# Altium PCB PCB1.PcbDoc
Units mm, origin at the board's own origin, x right, y up, seen from the top; angles counter-clockwise.
Board outline 56.64 x 44.57 mm, 2 copper layers (Top Layer, Bottom Layer); 66 components, 48 nets, 278 pads, 135 vias.
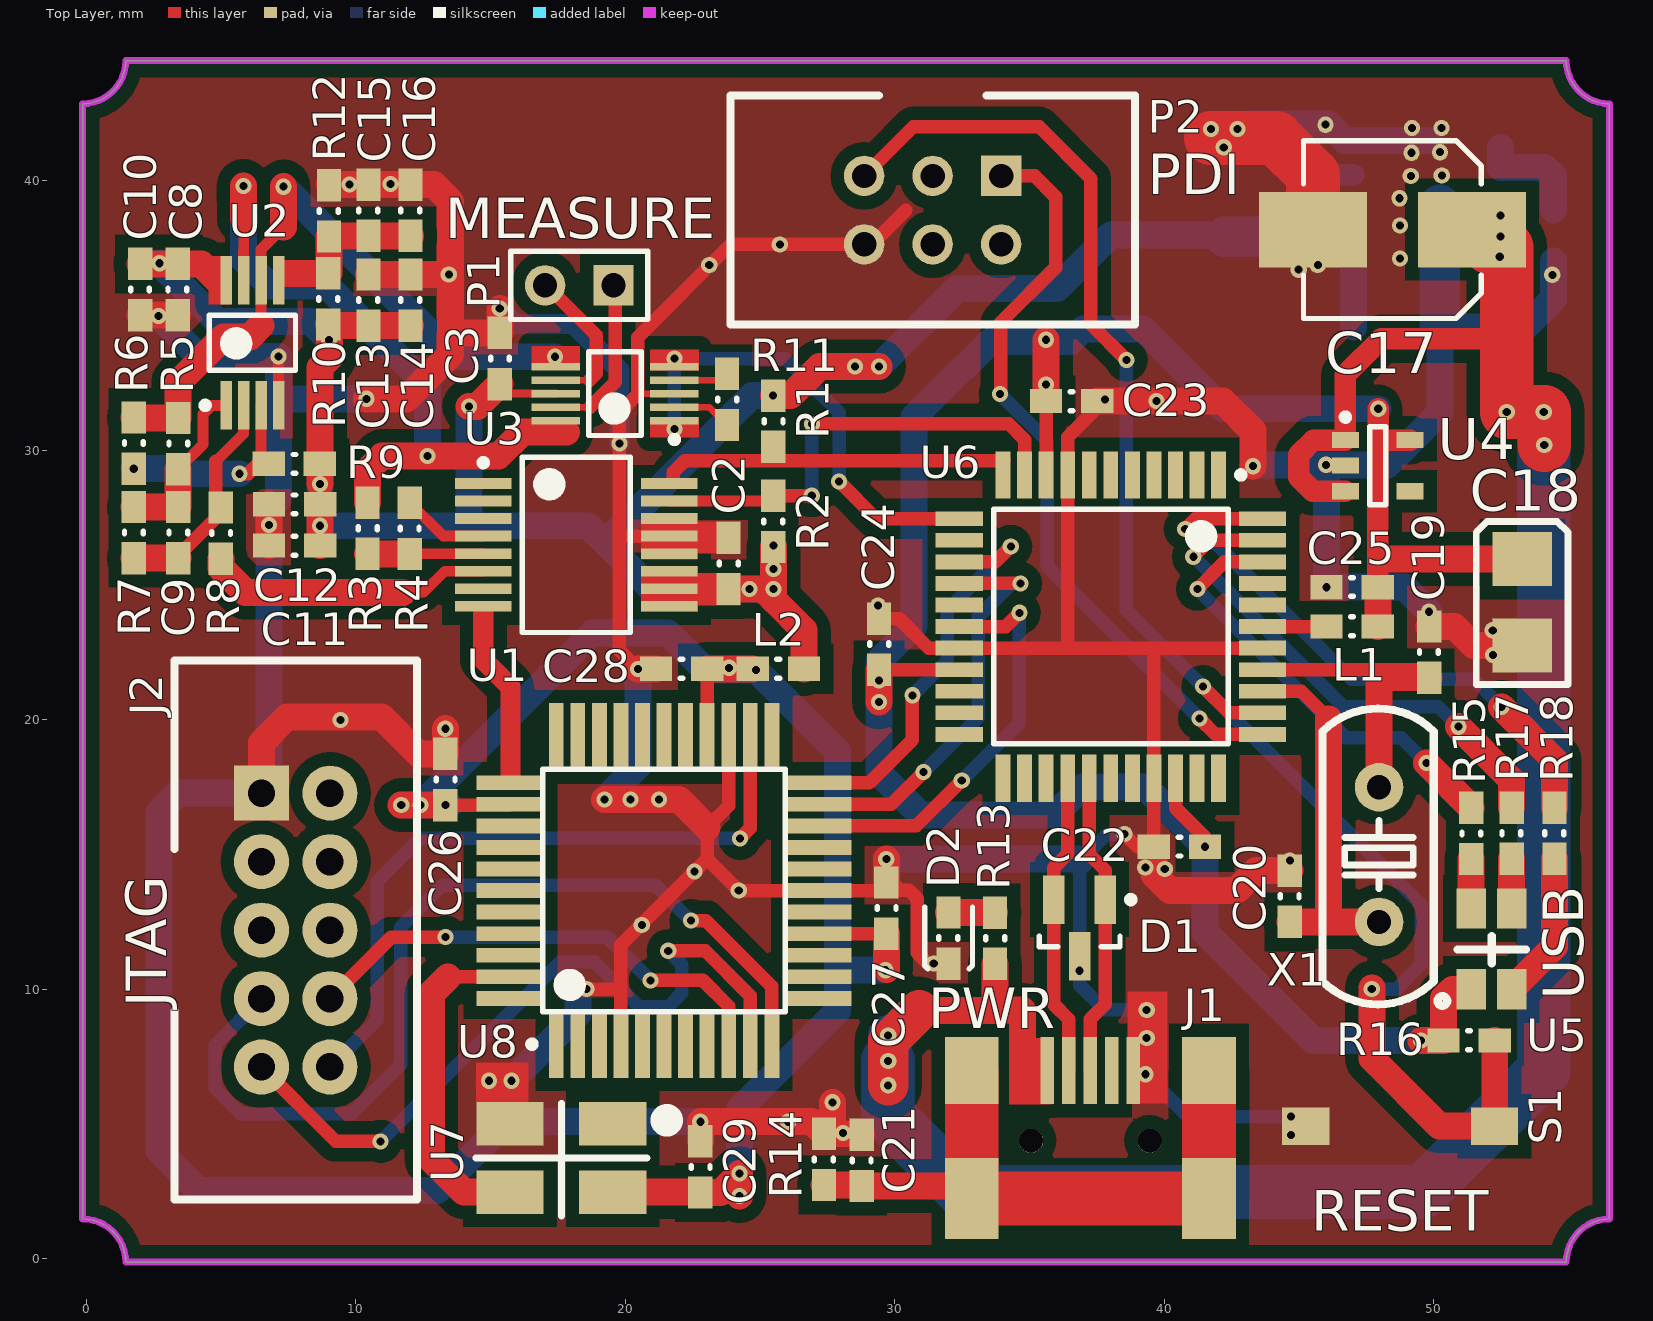
[diagram p0: Top Layer view]
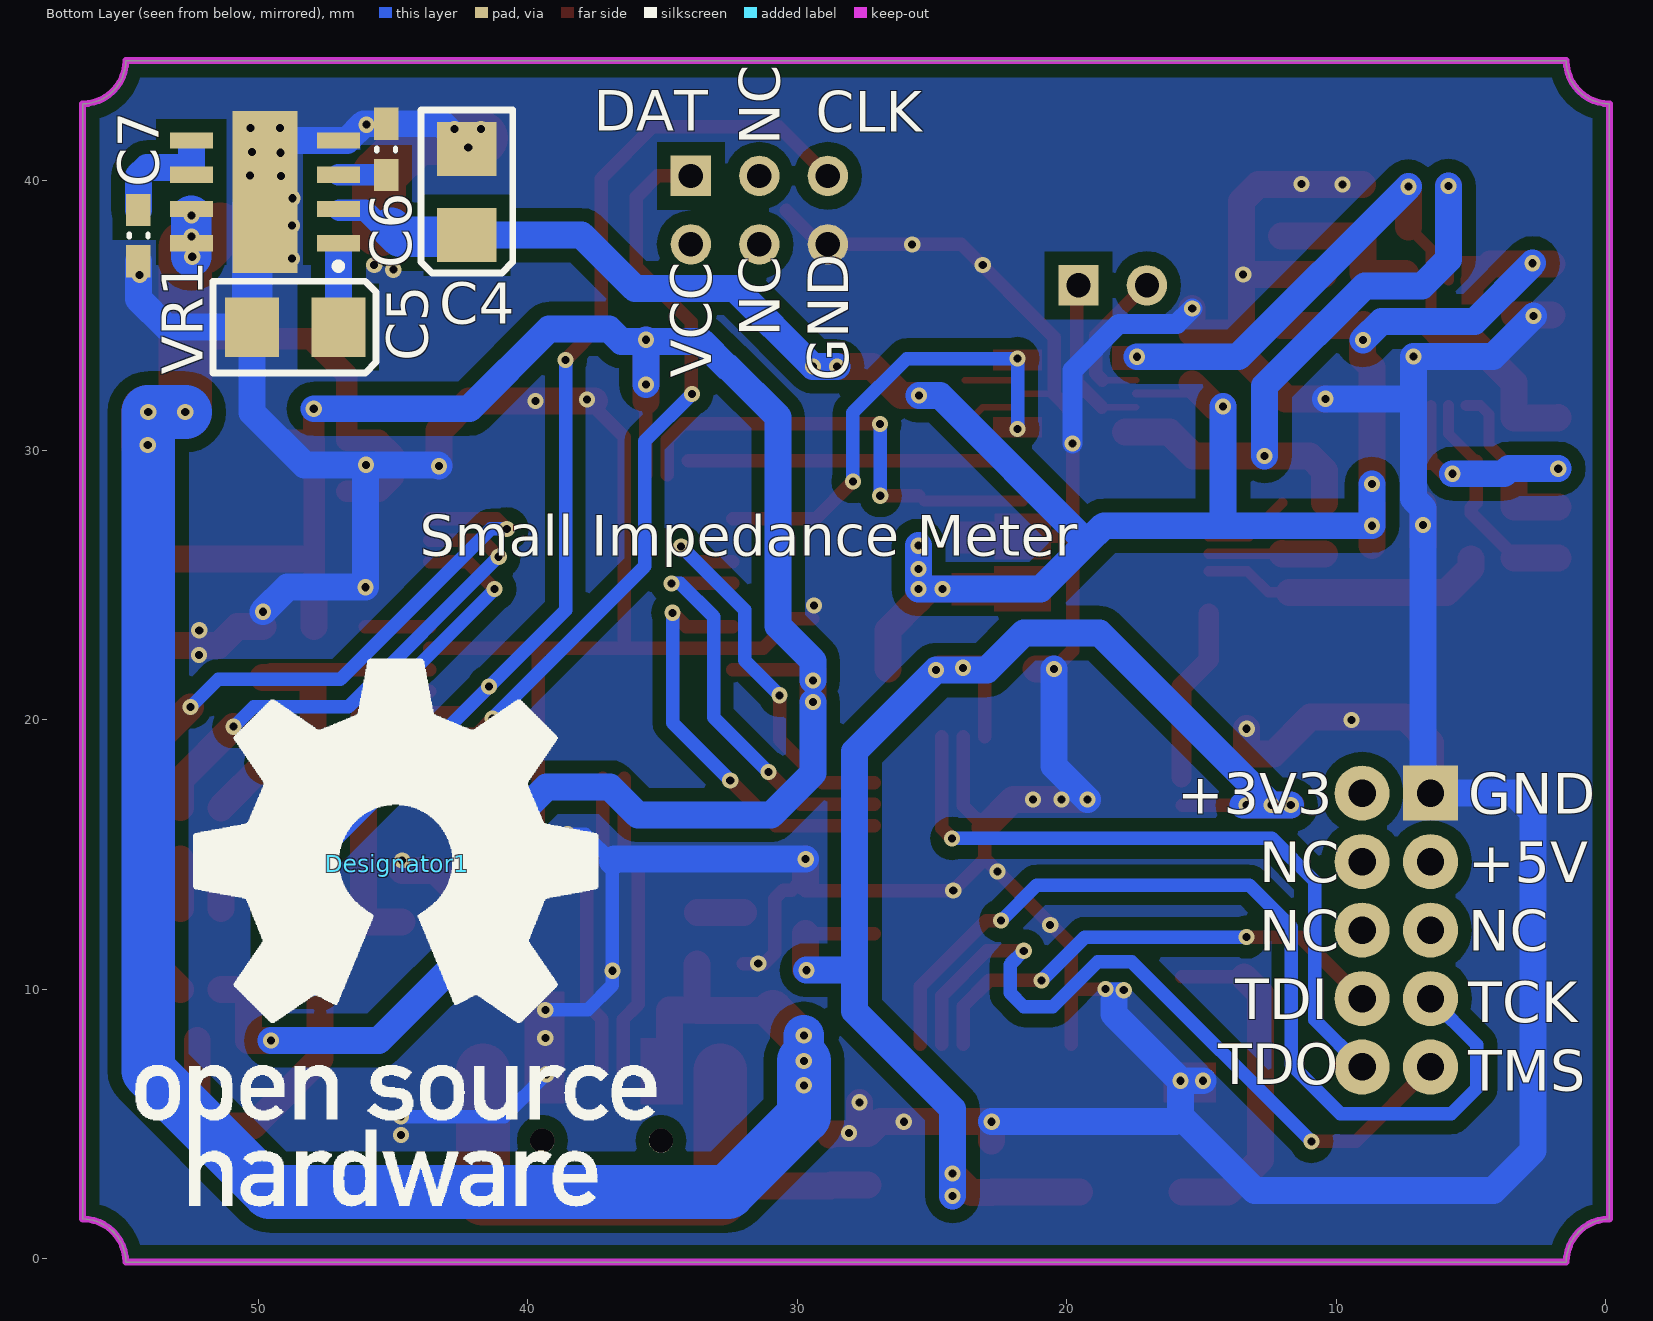
[diagram p1: Bottom Layer view, seen from below]

## Layer stack, top to bottom
Top Layer: signal copper 0.0356
Dielectric: core 0.32, FR-4, Dk 4.8
Bottom Layer: signal copper 0.0356

## Board outline
1.473,-0.127 ccw(c-0.127,-0.127) -0.127,1.473 -0.127,42.847 ccw(c-0.127,44.447) 1.473,44.447 54.917,44.447 ccw(c56.517,44.447) 56.517,42.847 56.517,1.473 ccw(c56.517,-0.127) 54.917,-0.127

## Design rules (kind name [scope] priority, off if disabled: settings)
Clearance Clearance_2 [InNamedPolygon('Bottom_GND') vs not InNet('GND')] p1: gap=0.5
Clearance Clearance_1 [InNamedPolygon('Top_GND') vs not InNet('GND')] p2: gap=0.5
Clearance [All] p3: gap=0.203
ComponentClearance [All] p1: gap=0 collisioncheckmode=3 verticalgap=0 showdistances=FALSE
DiffPairsRouting [All] p1: maxlimit=25.4 minlimit=0.203 mostfreqgap=0.381 maxuncoupledlength=12.7
HoleToHoleClearance [All] p1: gap=0 allowstackedmicrovias=TRUE
MinimumSolderMaskSliver [All] p1: minsoldermaskwidth=0
PlaneConnect [All] p1: planeconnectstyle=Direct reliefexpansion=0.508 reliefentries=4 reliefconductorwidth=0.254 reliefairgap=0.254
PolygonConnect [All] p1: connectstyle=Direct reliefconductorwidth=0.254 reliefentries=4 polygonreliefangle="90 Angle"
RoutingVias [(StartLayer = 'Top Layer') and (StopLayer = 'Bottom Layer')] p1: holewidth=0.3 width=0.6 viastyle="Through Hole" minholewidth=0.3 minwidth=0.6 maxholewidth=0.3 maxwidth=0.6
SilkToSilkClearance [All] p1: silktosilkclearance=0
SilkscreenOverComponentPads [All] p1: minsilkscreentomaskgap=0
SolderMaskExpansion [All] p1: expansion=0
Width [All] p1: maxlimit=25.4 minlimit=0.203 preferedwidth=0.381
21 further rules are at their usual default settings.

## Classes and differential pairs
component class microcontroller: C17 C18 C19 C20 C21 C22 C23 C24 C25 D1 D2 J1 L1 P2 R13 R14 R15 R16 R17 R18 S1 U4 U5 U6 X1
component class clk_gen: C26 C27 C28 C29 J2 L2 U7 U8
component class analog: C2 C3 C4 C5 C6 C7 C8 C9 C10 C11 C12 C13 C14 C15 C16 P1 R1 R2 R3 R4 R5 R6 R7 R8 R9 R10 R11 R12 U1 U2 U3 VR1
differential pair XTAL: +XTAL_P -XTAL_N
differential pair USB: +USB_P -USB_N

## Components (designator, comment, footprint, x,y, rotation, side; value= is the part's Value field where it differs from the comment)
C2 "C0603" 0603_HANDSOLDERING 23.84,25.8 r90 top
C3 "C0603" 0603_HANDSOLDERING 15.35,33.4 r90 top
C4 "Tantal B" AVX-CAPC3528_V 42.26,39.57 r90 bottom
C5 "Tantal B" AVX-CAPC3528_V 48.63,34.56 r0 bottom
C6 "C0603" 0603_HandSoldering 45.25,41.15 r270 bottom
C7 "C0603" 0603_HandSoldering 54.45,37.96 r90 bottom
C8 "C0603" 0603_HANDSOLDERING 3.4,35.95 r270 top
C9 "C0603" 0603_HANDSOLDERING 3.42,26.94 r90 top
C10 "C0603" 0603_HANDSOLDERING 2.01,35.95 r270 top
C11 "C0603" 0603_HANDSOLDERING 7.74,26.46 r0 top
C12 "C0603" 0603_HANDSOLDERING 7.74,27.99 r0 top
C13 "C0603" 0603_HANDSOLDERING 10.48,35.56 r270 top
C14 "C0603" 0603_HANDSOLDERING 12.04,35.56 r270 top
C15 "C0603" 0603_HANDSOLDERING 10.48,38.89 r270 top
C16 "C0603" 0603_HANDSOLDERING 12.04,38.89 r270 top
C17 "Alu D8" "PANASONIC SIZE D8" 48.47,38.18 r180 top
C18 "Tantal B" AVX-CAPC3528_V 53.28,24.35 r270 top
C19 "C0603" 0603_HANDSOLDERING 49.83,22.5 r270 top
C20 "C0603" 0603_HANDSOLDERING 44.66,13.44 r270 top
C21 "C0603" 0603_HANDSOLDERING 28.78,3.64 r270 top
C22 "C0603" 0603_HANDSOLDERING 40.56,15.28 r180 top
C23 "C0603" 0603_HANDSOLDERING 36.57,31.82 r0 top
C24 "C0603" 0603_HANDSOLDERING 29.42,22.8 r90 top
C25 "C0603" 0603_HANDSOLDERING 46.97,24.91 r180 top
C26 "C0603" 0603_HANDSOLDERING 13.33,17.78 r90 top
C27 "C0603" 0603_HANDSOLDERING 29.69,13.01 r90 top
C28 "C0603" 0603_HANDSOLDERING 22.09,21.88 r180 top
C29 "C0603" 0603_HANDSOLDERING 22.79,3.41 r90 top
D1 "TPD2E009" TPD2E009_SOT23_3 36.86,12.27 r270 top
D2 "LED 0603" 0603_LED 32,11.89 r270 top
Designator1 "Comment" OpenSourceHWLOGO 44.84,14.67 r180 bottom
J1 "USB_mini_B" "USB MINI B RECEPTACLE" 37.26,4.23 r0 top
J2 "JTAG_IDC10" IDC10 7.78,12.19 r270 top
L1 "i0603" 0603_HANDSOLDERING 46.97,23.45 r180 top
L2 "i0603" 0603_HANDSOLDERING 25.68,21.88 r180 top
P1 "MEASURE" HDR1X2 19.57,36.11 r180 top
P2 "PDI" PDI_HDR2X3 31.41,38.9 r180 top
R1 "R0603" 0603_HandSoldering 25.5,31.07 r90 top
R2 "R0603" 0603_HandSoldering 25.5,27.35 r270 top
R3 "R0603" 0603_HANDSOLDERING 10.44,27.1 r90 top
R4 "R0603" 0603_HANDSOLDERING 12.01,27.09 r270 top
R5 "R0603" 0603_HANDSOLDERING 3.42,30.24 r90 top
R6 "R0603" 0603_HANDSOLDERING 1.77,30.26 r90 top
R7 "R0603" 0603_HANDSOLDERING 1.77,26.94 r90 top
R8 "R0603" 0603_HANDSOLDERING 5,26.92 r90 top
R9 "R0603" 0603_HANDSOLDERING 7.73,29.49 r0 top
R10 "R0603" 0603_HANDSOLDERING 8.99,35.6 r270 top
R11 "R0603" 0603_HANDSOLDERING 23.78,31.88 r90 top
R12 "R0603" 0603_HANDSOLDERING 9.01,38.87 r270 top
R13 "R0603" 0603_HANDSOLDERING 33.72,11.89 r90 top
R14 "R0603" 0603_HANDSOLDERING 27.38,3.68 r270 top
R15 "R0603" 0603_HANDSOLDERING 51.39,15.78 r90 top
R16 "R0603" 0603_HANDSOLDERING 51.31,8.09 r180 top
R17 "R0603" 0603_HANDSOLDERING 52.89,15.78 r270 top
R18 "R0603" 0603_HANDSOLDERING 54.48,15.78 r270 top
S1 "SW-SPST" KSR221G_LFS_TACTILE_SWITCH 48.753,4.915 r180 top
U1 "AD5933" AD5933 18.19,26.48 r0 top
U2 "AD8532" AD8532_MSOP8 6.17,33.98 r90 top
U3 "TS5A23159" TS5A23159_VSSOP10 19.63,32.09 r180 top
U4 "ADP150" ADP150 47.924,29.42 r0 top
U5 "RGB_LED" PLCC-4_LED 51.39,12.99 r0 top
U6 "ATXMEGA128A4U-AU" ATXMEGAA4U_TQFP44 38.02,23.45 r270 top
U7 "TCXO" TCXO_5X3 17.634,3.735 r180 top
U8 "XC9572XL" XC9572XL_QFP44 21.444,13.655 r90 top
VR1 "ADM7150" ADM7150_SOIC8 47.03,37.67 r0 bottom
X1 "16MHz" XTAL_TH_LOW 47.97,14.99 r270 top

## Footprints (in the part's own frame and the unit in brackets; to place one, negate y for a bottom-side part, rotate by r counter-clockwise, add the part's x,y. Pads: shape width x height; smd on the part's side, far side on the other; paste and mask are expansions set on the pad)
0603_HANDSOLDERING [mm] "Chip Resistor, 2-Leads, Body 1.6x0.8mm, IPC Medium Density"
  rect 1.2x0.9 smd: 1(-0.954,0) 2(0.946,0)
  silkscreen extent -0.05,-0.36 0.05,0.34, body extent -0.85,-0.48 0.85,0.47, height 0.6
0603_HandSoldering [mm] "Chip Resistor, 2-Leads, Body 1.6x0.8mm, IPC Medium Density"
  rect 1.2x0.9 smd: 1(-0.954,0) 2(0.946,0)
  silkscreen extent -0.05,-0.36 0.05,0.34, body extent -0.85,-0.48 0.85,0.47, height 0.6
0603_LED [mm] "SMD LED, Body 1.6x0.8mm"
  rect 1.2x0.9 smd: 1(-0.954,0) 2(0.946,0)
  silkscreen extent -1.14,-0.89 1.14,0.89, body extent -0.85,-0.48 0.85,0.47, height 0.6
AD5933 [mm] "SOP, 16-Leads, Body 6,5x5,6mm (max), Pitch 0,65mm, IPC Medium Density"
  rect 2.1x0.4 smd: 1(-3.45,2.275) 2(-3.45,1.625) 3(-3.45,0.975) 4(-3.45,0.325) 5(-3.45,-0.325) 6(-3.45,-0.975) 7(-3.45,-1.625) 8(-3.45,-2.275) 9(3.45,-2.275) 10(3.45,-1.625) 11(3.45,-0.975) 12(3.45,-0.325) 13(3.45,0.325) 14(3.45,0.975) 15(3.45,1.625) 16(3.45,2.275)
  silkscreen extent -3.57,-3.25 2,3.25, body extent -2.8,-3.25 2.8,3.25, height 2
AD8532_MSOP8 [mm] "TSOP, 8-Leads, Body 3,2x3,2mm (max), Pitch 0,65mm, IPC Medium Density"
  rect 1.8x0.43 smd: 1(-2.325,0.975) 2(-2.325,0.325) 3(-2.325,-0.325) 4(-2.325,-0.975) 5(2.325,-0.975) 6(2.325,-0.325) 7(2.325,0.325) 8(2.325,0.975)
  silkscreen extent -2.45,-1.6 1.03,1.87, body extent -1.6,-1.6 1.6,1.6, height 1.1
ADM7150_SOIC8 [mm] "SOIC, 8-Leads, Body 4,90x3,90mm, Pitch 1,27mm, Thermal Pad 6,00x2,41mm, IPC Medium Density"
  rect 1.6x0.6 smd: 1(0,0) 2(0,-1.27) 3(0,-2.54) 4(0,-3.81) 5(5.45,-3.81) 6(5.45,-2.54) 7(5.45,-1.27) 8(5.45,0)
  rect 2.41x6 smd: 4(2.725,-1.905)
  silkscreen extent -0.12,0.73 0.13,0.97, body extent 0.72,-4.41 4.72,0.6, height 1.65
ADP150 [mm] "SOT23, 5-Leads, Body 2,9x2,8mm (max), Pitch 0,95mm, IPC Medium Density"
  rect 1x0.6 smd: 1(-1.2,0.95) 2(-1.2,0) 3(-1.2,-0.95) 4(1.2,-0.95) 5(1.2,0.95)
  silkscreen extent -1.32,-1.45 0.3,1.92, body extent -0.8,-1.45 0.8,1.45, height 1
ATXMEGAA4U_TQFP44 [mm] "TQFP, 44-Leads, Body 12,3x12,3mm (max), Pitch 0,80mm, IPC Medium Density"
  rect 1.75x0.55 smd: 1(-5.625,4) 2(-5.625,3.2) 3(-5.625,2.4) 4(-5.625,1.6) 5(-5.625,0.8) 6(-5.625,0) 7(-5.625,-0.8) 8(-5.625,-1.6) 9(-5.625,-2.4) 10(-5.625,-3.2) 11(-5.625,-4) 23(5.625,-4) 24(5.625,-3.2) 25(5.625,-2.4) 26(5.625,-1.6) 27(5.625,-0.8) 28(5.625,0) 29(5.625,0.8) 30(5.625,1.6) 31(5.625,2.4) 32(5.625,3.2) 33(5.625,4)
  rect 0.55x1.75 smd: 12(-4,-5.625) 13(-3.2,-5.625) 14(-2.4,-5.625) 15(-1.6,-5.625) 16(-0.8,-5.625) 17(0,-5.625) 18(0.8,-5.625) 19(1.6,-5.625) 20(2.4,-5.625) 21(3.2,-5.625) 22(4,-5.625) 34(4,5.625) 35(3.2,5.625) 36(2.4,5.625) 37(1.6,5.625) 38(0.8,5.625) 39(0,5.625) 40(-0.8,5.625) 41(-1.6,5.625) 42(-2.4,5.625) 43(-3.2,5.625) 44(-4,5.625)
  silkscreen extent -5.75,-4.35 4.35,4.95, body extent -5,-5 5,5, height 1.2
AVX-CAPC3528_V [mm] "SMT Capacitor, 2 Leads, Body 3.5x2.8mm"
  rect 2x2.2 smd: 1(-1.6,0) 2(1.6,0)
  silkscreen extent -3,-1.7 3.05,1.7, body extent -1.79,-1.54 1.8,1.54, height 1.9
HDR1X2 [mm] "Connector; Header; 2 Position"
  rect 1.5x1.5 hole 0.9: 1(0,0)
  round 1.5 hole 0.9: 2(2.54,0)
  silkscreen extent -1.27,-1.27 3.81,1.27
IDC10 [mm] "IDC 10 pin connector"
  rect 2.04x2.04 hole 1.02: 1(-5.08,-1.27)
  round 2.04 hole 1.02: 2(-2.54,-1.27) 3(0,-1.27) 4(2.54,-1.27) 5(5.08,-1.27) 6(5.08,1.27) 7(2.54,1.27) 8(0,1.27) 9(-2.54,1.27) 10(-5.08,1.27)
  silkscreen extent -10,-4.5 10,4.5, body extent -10.15,-4.4 10.15,4.7, height 9.3
KSR221G_LFS_TACTILE_SWITCH [mm] "C & K COMPONENTS  KSR221G LFS  SWITCH, SPST, 0.05A, 32VDC, SMD"
  rect 1.75x1.4 smd: 1(-3.5,0) 2(3.5,0)
  body extent -3.18,-2.03 3.18,2.03, height 2.5
OpenSourceHWLOGO [mm] "OpenSourceHWLOGO"
  silkscreen extent -9.72,-12.73 9.6,7.57
"PANASONIC SIZE D8" [mm] "Aluminum Electrolytic Capacitor, Body 6,60x6,60x7,70mm, IPC Low Density"
  rect 4x2.8 smd: 1(-2.95,0) 2(2.95,0)
  silkscreen extent -3.3,-3.3 3.3,3.3, body extent -3.3,-3.3 3.3,3.3, height 7.7
PDI_HDR2X3 [mm] "PDI Connector; Header; 3x2 Position"
  rect 1.5x1.5 hole 0.9: 1(-2.54,-1.27)
  round 1.5 hole 0.9: 2(-2.54,1.27) 3(0,-1.27) 4(0,1.27) 5(2.54,-1.27) 6(2.54,1.27)
  silkscreen extent -7.5,-4.25 7.5,4.25, body extent -7.62,-4.47 7.62,4.98, height 9.1
PLCC-4_LED [mm] "Standard PLCC-4 LED package"
  rect 1.1x1.5 smd: 1(0,-3) 2(0,0) 3(1.5,0) 4(1.5,-3)
  silkscreen extent -1.25,-3.61 2.03,-1.02, body extent -0.63,-3.11 2.16,0.06, height 1.9
TCXO_5X3 [mm] "TCXO 5mm x 3.2mm"
  rect 2.5x1.6 smd: 1(-1.905,-1.27) 2(1.905,-1.27) 3(1.905,1.27) 4(-1.905,1.27)
  silkscreen extent -4.01,-2.03 3.17,2.16, body extent -2.54,-1.59 2.54,1.59, height 1.5
TPD2E009_SOT23_3 [mm] "SOT23, 3-Leads, Body 3,0x2,6mm (max), Pitch 0,95mm, IPC Medium Density"
  rect 1.8x0.8 smd: 1(-1.05,0.95) 2(-1.05,-0.95) 3(1.05,0)
  silkscreen extent -1.17,-1.5 0.7,2.03, body extent -0.7,-1.52 0.7,1.52, height 1.12
TS5A23159_VSSOP10 [mm] "TSSOP, 10-Leads, Body 3,1x3,1mm (max), Pitch 0,50mm, IPC Medium Density"
  rect 1.8x0.27 smd: 1(-2.2,1) 2(-2.2,0.5) 3(-2.2,0) 4(-2.2,-0.5) 5(-2.2,-1) 6(2.2,-1) 7(2.2,-0.5) 8(2.2,0) 9(2.2,0.5) 10(2.2,1)
  silkscreen extent -2.33,-1.55 0.97,1.82, body extent -1.55,-1.55 1.55,1.55, height 1.1
"USB MINI B RECEPTACLE" [mm] "popravek"
  rect 0.5x2.5 smd: 1(-1.6,2.75) 2(-0.8,2.75) 3(0,2.75) 4(0.8,2.75) 5(1.6,2.75)
  rect 2x3 smd: 6(-4.4,-2) 6(4.4,-2)
  rect 2x2.5 smd: 6(-4.4,2.75) 6(4.4,2.75)
  round 0.9 hole 0.9: ""(-2.2,0.15) ""(2.2,0.15)
  body extent -4.95,-5.75 4.95,3.25, height 4
XC9572XL_QFP44 [mm] "QFP, 44-Leads, Body 9,80x9,80mm, Pitch 0,80mm, IPC Medium Density"
  rect 2.5x0.55 smd: 1(-5.7,4) 2(-5.7,3.2) 3(-5.7,2.4) 4(-5.7,1.6) 5(-5.7,0.8) 6(-5.7,0) 7(-5.7,-0.8) 8(-5.7,-1.6) 9(-5.7,-2.4) 10(-5.7,-3.2) 11(-5.7,-4) 23(5.7,-4) 24(5.7,-3.2) 25(5.7,-2.4) 26(5.7,-1.6) 27(5.7,-0.8) 28(5.7,0) 29(5.7,0.8) 30(5.7,1.6) 31(5.7,2.4) 32(5.7,3.2) 33(5.7,4)
  rect 0.55x2.5 smd: 12(-4,-5.7) 13(-3.2,-5.7) 14(-2.4,-5.7) 15(-1.6,-5.7) 16(-0.8,-5.7) 17(0,-5.7) 18(0.8,-5.7) 19(1.6,-5.7) 20(2.4,-5.7) 21(3.2,-5.7) 22(4,-5.7) 34(4,5.7) 35(3.2,5.7) 36(2.4,5.7) 37(1.6,5.7) 38(0.8,5.7) 39(0,5.7) 40(-0.8,5.7) 41(-1.6,5.7) 42(-2.4,5.7) 43(-3.2,5.7) 44(-4,5.7)
  silkscreen extent -5.82,-4.5 4.5,5.02, body extent -4.9,-4.9 4.9,4.9, height 2.45
XTAL_TH_LOW [mm] "XTAL TH low profile"
  round 1.8 hole 0.9: 1(-2.5,0) 2(2.5,0)
  silkscreen extent -5.42,-2.1 5.55,2.03, body extent -5.46,-2.16 5.59,2.03, height 3

## Part data
C2 C3 C6 C7 C8 C9 C10 C11 C12 C13 C14 C15 C16 C19 C20 C21 C22 C23 C24 C25 C26 C27 C28 C29: library part Capacitor, "Ceramic Capacitor"
C4 C5 C18: library part "Capacitor Tantalum", "Tantalum Capacitor"
C17: library part "Capacitor Aluminium", "Aluminium Electrolythic Capacitor"
D1: "ESD protection"
D2: library part LED, "SMD LED 0603"
J1: "USB 2.0 mini B receptacle"
J2: "JTAG IDC10 Bus Pirate"
L1 L2: library part Inductor, "Inductor"
P1: library part "Header 2", "Header, 2-Pin"
P2: library part PDI_Header, "PDI Programming Interface"
R1 R2 R3 R4 R5 R6 R7 R8 R9 R10 R11 R12 R13 R14 R15 R16 R17 R18: library part Resistor, "Resistor"
S1: "KSR221G LFS Tactile Switch"
U1: "network analyzer"
U2: "opamp high current out"
U3: "1-Ohm 5-V/3.3-V 2-Channel SPDT Switch"
U4: "100 mA +5V regulator"
U5: "RGB LED ASMB-MTB0-0A3A2"
U6: "8/16-bit Atmel XMEGA Microcontroller"
U7: "FOX FOX924B-16.000  TCXO, 16.0MHZ, 3.3V CMOS, SMD"
U8: "Xilinx CPLD 72 macrocells"
VR1: "800 mA Ultralow Noise,  High PSRR, RF Linear Regulator"
X1: "XTAL TH low profile"

## Via types
v1: diameter 0.6, hole 0.3, Top Layer to Bottom Layer, tented both sides, 135 vias

## Nets (pads, with @x,y where several pads share a name; then routed paths per layer and width w, separated by ;. In a path a pad name is that pad's centre, name@x,y a point inside that pad or via, vN(x,y) a via of type N, cw(c..) or ccw(c..) an arc to the next point about the centre after c; other vN are vias at no path point)
+3.3V_A: C2.1 C3.1 C4.1 C8.1 C10.1 C11.2 C12.2 C13.2 C14.2 L2.1 R1.2 R2.2 R9.2 R10.2 U1.9 U1.10 U1.11 U2.8 U3.8 VR1.2 | length 90.9
  Top Layer w0.3: C3.1@15.21,32.09 U3.8
  Top Layer w1: C10.1 C8.1 4.276,36.904 4.9,36.28 ; C11.2 v1(8.686,27.19) C12.2 ; v1(8.686,28.74) 8.686,29.48 R9.2 8.676,33.066 9.03,33.42 R10.2@9.03,34.614 ; R10.2 R10.2@9.03,34.614 ; C14.2 C13.2 R10.2@9.03,34.614 ; v1(14.21,31.62) 14.524,31.62 C3.1 ; C2.1 25.104,24.846 25.5,24.45 ; 25.5,24.44 25.5,24.45 ; R2.2 25.5,24.45 ; R1.2 26.136,32.016 27.22,33.1 v1(28.53,33.1) v1(29.42,33.1) ; L2.1 26.634,23.316 25.5,24.45
  Bottom Layer w0.8: 45.06,38.24 45.38,38.24 46.041,38.901 VR1.2@46.991,38.901
  Bottom Layer w1: v1(2.72,36.93) 4.88,34.77 8.33,34.77 v1(9.02,34.08) ; v1(8.686,28.74) v1(8.686,27.19) 14.21,27.19 ; v1(14.21,31.62) 14.21,27.19 ; v1(25.49,32.02) 24.71,32.02 19.26,26.57 19.25,26.57 ; v1(25.51,26.45) v1(25.51,24.84) 20.98,24.84 19.25,26.57 ; v1(28.53,33.1) v1(29.42,33.1) 32.32,36 36.03,36 38,37.97 C4.1 ; 14.21,27.19 18.63,27.19 19.25,26.57
  Bottom Layer w1.5: C4.1@42.26,37.92 44.74,37.92 45.06,38.24
  other v1: 24.61,24.84 25.51,25.59
+3.3V_C: C26.1 C27.1 C28.1 C29.1 L2.2 U7.4 U8.15 U8.26 U8.35 | length 59.5
  Top Layer w0.5: v1(13.33,16.826) U8.35@15.715,16.826 ; U8.26 C28.1 ; U8.15 C27.1 ; v1(29.66,10.7) v1@29.69,10.73
  Top Layer w1: v1@11.69,16.826 v1(11.696,16.826) v1(12.41,16.826) v1(13.33,16.826) ; U7.4 C29.1@22.781,2.465 ; C29.1 23.536,2.456 v1(24.24,3.16) v1(24.24,2.32) ; C28.1 L2.2 ; v1@29.69,10.73 C27.1
  Bottom Layer w1: v1(11.696,16.826) v1(12.41,16.826) ; v1@13.474,16.826 v1(12.41,16.826) ; v1(24.24,2.32) v1(24.24,3.16) 24.24,5.55 27.88,9.19 27.88,10.7 ; v1(29.66,10.7) 27.88,10.7 ; v1(12.41,16.826) 18.794,23.21 21.6,23.21 22.97,21.84 v1(24.86,21.84) 27.88,18.82 27.88,10.7
  other v1: 23.86,21.92
+3.3V_M: C18.1 C22.1 C23.1 C24.1 C25.1 L1.1 R16.2 U4.5 U5.1 U6.9 U6.19 U6.31 | length 91.6
  Top Layer w0.5: C24.1 29.424,21.85 U6.19 ; C23.1 35.616,29.079 U6.9 ; U6.31 40.42,16.72 41.514,15.626 v1(41.514,15.28)
  Top Layer w0.8: C25.1 47.924,30.37 ; 47.927,30.37 U4.5 ; 47.94,30.383 v1(47.94,31.53)
  Top Layer w1: v1(29.42,20.65) v1(29.42,21.45) C24.1 ; v1(35.61,34.09) 35.616,34.084 v1(35.616,32.43) C23.1 ; L1.1 C25.1 ; 48.074,25.95 C18.1 ; v1(49.53,8.09) R16.2 50.364,9.664 50.69,9.99 U5.1
  Bottom Layer w1: v1(29.42,20.65) 29.42,18.01 30.97,16.46 35.92,16.46 36.95,17.49 39.304,17.49 v1(41.514,15.28) 41.514,12.106 45.53,8.09 v1(49.53,8.09) ; v1(29.42,21.45) 29.42,22.18 30.71,23.47 30.71,31.22 32.575,33.085 32.605,33.085 33.55,34.03 36.522,34.03 36.982,34.49 39.21,34.49 42.17,31.53 v1(47.94,31.53) ; v1(35.616,32.43) v1@35.616,34.09
GND: C2.2 C3.2 C4.2 C5.2 C6.1 C7.1 C8.2 C10.2 C11.1 C12.1 C13.1 C14.1 C15.1 C16.1 C17.2 C18.2 C19.1 C20.1 C21.1 C22.2 C23.2 C24.2 C25.2 C26.2 C27.2 C28.2 C29.2 D1.3 D2.2 J1.5 J2.1 P2.6 R12.1 R14.1 S1.2 U1.12 U1.13 U1.14 U2.4 U3.3 U4.2 U6.8 U6.18 U6.30 U6.38 U7.2 U8.4 U8.17 U8.25 VR1.4 | length 305.3
  Top Layer w0.25: 20.49,32.09 U3.3
  Top Layer w0.4: U2.4 v1(7.145,33.47)
  Top Layer w0.5: R12.1 R12.1@9.03,39.844 ; v1(18.57,10) 19.844,10 ; U8.4 19.844,10 ; 19.845,26.805 U1.13 ; v1(20.48,21.87) 19.79,22.56 v1(19.79,30.24) 19.79,31.39 20.49,32.09 20.477,32.103 20.477,34.187 23.92,37.63 P2.6 29.16,37.63 30.42,38.89 ; U8.25 23.844,16.804 23.04,16 23.04,14.83 ; C24.2 30.164,23.746 31.26,22.65 U6.18 36.42,22.65 ; C27.2 29.924,13.956 30.21,13.67 30.53,13.67 30.84,13.36 30.84,11.34 31.236,10.944 v1(31.45,10.944) D2.2 ; C27.2@29.7,13.655 U8.17 v1(24.215,13.655) 23.04,14.83 ; C23.2 37.516,31.576 36.42,30.48 U6.8 36.42,22.65 ; v1(38.53,15.75) 39,15.28 C22.2 ; C22.2@39.62,15.286 U6.30 39.62,22.61 ; U6.38 36.42,22.65 ; v1@46,29.42 U4.2 ; 19.844,10 19.844,11.634 23.04,14.83
  Top Layer w1: C10.2 C8.2 ; J2.1 6.51,19.14 7.46,20.09 10.97,20.09 12.334,18.726 C26.2 v1(13.33,19.66) ; C11.1 v1(6.786,27.22) C12.1 ; R12.1@9.03,39.844 C15.1 C16.1 12.906,39.844 13.53,39.22 13.53,33.55 11.88,31.9 v1(10.4,31.9) ; C13.1 C14.1 v1(13.46,36.514) v1@13.51,36.514 ; 13.624,34.346 C3.2 v1(15.35,35.25) ; v1(19.235,17.035) v1(20.2,17.035) v1(21.255,17.035) 22.005,17.035 23.04,16 ; v1(20.48,21.87) 20.49,21.88 C28.2 ; C29.2 v1(22.79,5.08) v1(26.05,5.08) 26.934,5.08 R14.1 28.74,4.634 C21.1 ; R14.1@27.69,4.944 v1(27.69,5.8) ; C27.2 v1(29.69,14.82) ; C23.2 v1(39.71,31.82) 42.18,31.82 43.285,30.715 43.29,30.72 v1(43.29,29.4) ; C22.2 39.614,14.256 40.22,13.65 42.67,13.65 43.414,14.394 C20.1 ; C19.1 50.766,23.454 51.47,22.75 C18.2
  Top Layer w2: 41.74,41.57 44.15,41.57 45.52,40.2 C17.2
  Bottom Layer w0.5: v1(17.89,9.96) 17.93,10 v1(18.57,10) ; v1(38.53,15.75) 37.87,15.75 36.86,14.74 v1(36.86,10.68) 36.86,10.15 37.78,9.23 v1(39.35,9.23) ; v1(39.31,6.84) 40.88,5.27 v1(44.71,5.27)
  Bottom Layer w0.75: v1(15.35,35.25) 15.92,34.68 18.07,34.68 19.79,32.96 v1(19.79,30.24)
  Bottom Layer w1: v1(2.69,34.97) 4.19,33.47 v1(7.145,33.47) 7.145,28.195 6.786,27.836 v1(6.786,27.22) J2.1@6.786,17.546 ; J2.1 3.42,17.27 2.7,16.55 2.7,4.01 4.18,2.53 13.03,2.53 15.78,5.28 ; 7.225,31.9 v1(10.4,31.9) ; v1(14.95,6.6) v1(15.78,6.6) ; 18.25,9.6 18.25,9.07 v1(15.78,6.6) ; v1(19.235,17.035) 19.717,17.517 20.48,18.28 v1(20.48,21.87) ; v1(22.79,5.08) 15.98,5.08 15.78,5.28 ; v1(29.69,14.82) 36.78,14.82 36.86,14.74 ; C4.2 43.194,42.104 C6.1 46.086,42.104 46.71,41.48 47.03,41.48 VR1.4@49.84,41.48 ; v1(43.29,29.4) 43.34,29.45 v1(46,29.45) 48.29,29.45 50.23,31.39 C5.2 53.4,34.56 54.45,35.61 C7.1 ; v1@46.024,29.426 v1(46.024,24.91) 48.92,24.91 v1(49.83,24) ; 15.78,5.28 v1(15.78,6.6)
  Bottom Layer w1.5: C5.2 VR1.4@50.23,39.1
  other v1: 44.71,4.59 28.08,4.66 39.35,8.19 20.62,12.38 22.57,14.36 40.02,14.46 39.3,14.51 44.66,14.77 9.44,19.98 52.2,22.39 52.19,23.31 29.38,24.23 37.8,31.88 54.4,36.5 44.99,36.69 23.12,36.87 45.7,36.87 48.75,37.1 25.74,37.63 48.75,38.33 48.73,39.34 9.77,39.85 11.29,39.87 49.15,40.17 50.3,40.18 49.17,41.03 50.23,41.05 42.21,41.23 41.74,41.91 42.72,41.91 49.19,41.95 50.29,41.95 45.98,42.07
LED_BLUE: R15.2 U6.42 | length 16.4
  Top Layer w0.5: v1(41.23,24.84) 42.24,25.85 U6.42
  Top Layer w1: v1(49.73,18.386) R15.2
  Bottom Layer w0.5: v1(41.23,24.84) 46.75,19.32 48.796,19.32 v1(49.73,18.386)
LED_GREEN: R17.1 U6.43 | length 19.1
  Top Layer w0.5: v1(41.08,26.04) 41.69,26.65 U6.43
  Top Layer w1: v1(50.915,19.735) 52.89,17.76 R17.1
  Bottom Layer w0.5: v1(41.08,26.04) 41.095,26.04 46.655,20.48 50.17,20.48 v1(50.915,19.735)
LED_RED: R18.1 U6.44 | length 22
  Top Layer w0.5: v1(40.78,27.07) 41.16,27.45 U6.44
  Top Layer w1: v1(52.52,20.46) 54.48,18.5 R18.1
  Bottom Layer w0.5: v1(40.78,27.07) 41.37,27.07 46.95,21.49 51.49,21.49 v1(52.52,20.46)
MCLK: U7.3 U8.43 | length 12.8
  Top Layer w0.5: 13.435,10.455 U8.43
  Top Layer w1: 13.435,10.455 12.81,9.83 12.81,3.68 14.025,2.465 U7.3
NetC5_1: C5.1 VR1.1 | length 2.8
  Bottom Layer w1: C5.1 VR1.1@47.03,37.39
NetC6_2: C6.2 VR1.3 | length 1.8
  Bottom Layer w0.8: C6.2@45.25,40.21 VR1.3
NetC7_2: C7.2 VR1.5 VR1.6 | length 4.1
  Bottom Layer w1: VR1.5@52.48,41.22 52.48,40.48 54.13,40.48 54.45,40.16 C7.2
NetC9_1: C9.1 R7.1 R8.2 U2.2 | length 8.5
  Top Layer w0.4: 4.82,29.58 5.076,29.836 5.589,30.349 5.845,30.605 U2.2
  Top Layer w0.5: C9.1 3.42,26.077 5,27.657 R8.2 4.82,28.046 4.82,29.58
  Top Layer w1: R7.1 C9.1
NetC9_2: C9.2 R5.1 R7.2 U2.1 | length 6.5
  Top Layer w0.4: R5.1 4.34,30.206 4.34,31.33 4.665,31.655 U2.1
  Top Layer w1: R7.2 C9.2 R5.1
NetC15_2: C15.2 C16.2 R10.1 R12.2 U2.5 | length 6
  Top Layer w1: 7.44,36.554 R10.1 9.01,36.574 R12.2 9.03,37.944 C15.2 C16.2
NetC21_2: C21.2 J1.6 R14.2 | length 23.3
  Top Layer w1: R14.2 28.74,2.734 C21.2 J1.6@32.396,2.694
  Top Layer w2: J1.6@32.86,6.98 32.86,2.23 41.66,2.23 J1.6@41.66,6.98
NetD2_1: D2.1 R13.2 | length 1.7
  Top Layer w1: D2.1 R13.2@33.712,12.844
NetL1_2: L1.2 U6.39 | length 2.4
  Top Layer w0.5: U6.39 L1.2
NetP1_1: P1.1 U3.9 | length 6.2
  Top Layer w0.25: U3.9 18.7,31.59
  Top Layer w0.5: 18.7,31.59 19.633,32.523 19.633,36.047 P1.1
NetP1_2: P1.2 U3.7 | length 5.7
  Top Layer w0.25: U3.7 18.68,32.59
  Top Layer w0.5: P1.2@17.074,36.11 18.93,34.254 18.93,32.84 18.68,32.59
  Top Layer w1: P1.2 P1.2@17.074,36.11
NetR1_1: R1.1 U1.16 U6.11 | length 12.7
  Top Layer w0.5: U1.16@21.782,28.898 21.782,29.172 22.22,29.61 U6.11@34.04,29.61
NetR2_1: R2.1 U1.15 U6.10 | length 17.2
  Top Layer w0.4: U1.15 R2.1@25.301,28.105
  Top Layer w0.5: R2.1 v1(26.924,28.304) ; v1(26.93,30.97) 34.23,30.97 34.82,30.38 U6.10
  Bottom Layer w0.5: v1@26.93,28.304 v1(26.93,30.97)
NetR3_1: R3.1 R4.2 U1.5 | length 4.3
  Top Layer w0.4: R4.2@12.021,26.155 U1.5
  Top Layer w1: R3.1 12.008,26.146 R4.2 R4.2@12.021,26.155
NetR4_1: R4.1 U1.4 | length 3.2
  Top Layer w0.4: R4.1 13.249,26.805 U1.4
NetR6_1: R6.1 R9.1 U2.3 | length 7.5
  Top Layer w0.4: R9.1@6.495,29.771 U2.3
  Top Layer w0.5: v1(5.69,29.12) 6.01,29.12 6.4,29.51 R9.1@6.756,29.51 ; R9.1@6.495,29.771 R9.1@6.756,29.51 ; R9.1 R9.1@6.756,29.51
  Bottom Layer w1: v1(1.77,29.306) 3.604,29.306 3.79,29.12 v1(5.69,29.12)
NetR11_1: R11.1 U3.2 | length 2.2
  Top Layer w0.25: U3.2 23.116,31.59 R11.1
NetR11_2: R11.2 U3.4 | length 1.9
  Top Layer w0.25: U3.4 R11.2@23.78,32.59
NetR15_1: R15.1 U5.2 | length 1.8
  Top Layer w1: U5.2 R15.1
NetR17_2: R17.2 U5.3 | length 1.8
  Top Layer w1: U5.3 R17.2
NetR18_2: R18.2 U5.4 | length 5.5
  Top Layer w1: U5.4 54.48,11.58 R18.2
NetU1_8: U1.8 U8.34 | length 6.5
  Top Layer w0.75: 14.74,23.93 14.74,22.22 15.744,21.216 U8.34@15.744,17.86
NetU3_1: U3.1 U3.5 U6.12 | length 17.1
  Top Layer w0.5: v1(27.94,28.83) 29.32,27.45 U6.12
  Bottom Layer w0.5: v1(21.83,30.78) v1(21.83,33.39) 25.94,33.39 27.94,31.39 v1(27.94,28.83)
NetU6_14: U6.14 U8.22 | length 15
  Top Layer w0.5: U8.22 29.065,17.655 30.66,19.25 v1(30.66,20.9) ; U6.14 33.74,25.85 v1(34.31,26.42)
  Bottom Layer w0.5: v1(30.66,20.9) 31.96,22.2 31.96,24.07 v1(34.31,26.42)
NetU6_15: U6.15 U8.21 | length 15.4
  Top Layer w0.5: U8.21 29.875,16.855 v1(31.07,18.05) ; U6.15 v1(34.67,25.05)
  Bottom Layer w0.5: v1(31.07,18.05) 33.11,20.09 33.11,23.82 34.34,25.05 v1(34.67,25.05)
NetU6_17: U6.17 U8.20 | length 15.6
  Top Layer w0.5: U8.20 30.805,16.055 v1(32.49,17.74) ; U6.17 34.12,23.45 v1(34.63,23.96)
  Bottom Layer w0.5: v1(32.49,17.74) 34.63,19.88 v1(34.63,23.96)
PDI_CLK: P2.5 R16.1 S1.1 U6.35 | length 60.4
  Top Layer w0.5: P2.5 30.69,41.99 35.36,41.99 37.28,40.07 37.28,34.66 v1(38.6,33.34) ; v1(41.435,21.225) 42.41,20.25 U6.35
  Top Layer w1: v1@47.71,10.05 47.71,7.42 50.215,4.915 S1.1 ; S1.1@52.264,4.926 R16.1
  Bottom Layer w0.5: v1(38.6,33.34) 38.6,24.06 v1(41.435,21.225) 49.54,13.12 49.54,10.92 48.62,10 v1(47.7,10)
PDI_DAT: P2.1 U6.34 | length 28.3
  Top Layer w0.5: v1(33.91,32.08) 33.94,32.05 33.94,34.74 35.97,36.77 35.97,39.39 35.19,40.17 P2.1 ; v1(41.31,20.04) 41.9,19.45 U6.34
  Bottom Layer w0.5: v1(33.91,32.08) 35.67,30.32 35.67,25.68 v1(41.31,20.04)
SIG: R5.2 R6.2 U2.6 U3.6 | length 25.1
  Top Layer w0.4: 6.495,34.615 U2.6 6.495,37.435 7.33,38.27
  Top Layer w1: R6.2 1.79,31.186 R5.2 3.42,32.51 5.11,34.2 6.08,34.2 6.495,34.615 ; 7.33,38.27 v1(7.33,39.77)
  Bottom Layer w1: v1(7.33,39.77) 13.64,33.46 v1(17.4,33.46)
TCK: J2.4 U8.11 | length 35.3
  Top Layer w0.5: v1(22.44,12.54) 23,12.54 25.441,10.099 25.441,7.958 U8.11
  Bottom Layer w0.5: J2.4 4.79,7.93 4.79,6.32 5.74,5.37 9.85,5.37 11.67,7.19 11.67,12.29 13.24,13.86 21.12,13.86 v1(22.44,12.54)
TDI: J2.7 U8.9 | length 18.2
  Top Layer w0.5: J2.7 11.33,11.93 v1(13.34,11.93) ; v1(20.94,10.32) 22.89,10.32 23.844,9.366 U8.9
  Bottom Layer w0.5: v1(13.34,11.93) 19.33,11.93 v1(20.94,10.32)
TDO: J2.6 U8.24 | length 25.7
  Top Layer w0.5: v1(24.26,15.59) 24.644,15.974 U8.24
  Bottom Layer w0.5: J2.6 10.8,8.86 10.8,14 12.39,15.59 v1(24.26,15.59)
TMS: J2.5 U8.10 | length 27.7
  Top Layer w0.5: J2.5 9.27,4.35 v1(10.93,4.35) ; v1(21.6,11.42) 22.97,11.42 24.644,9.746 U8.10
  Bottom Layer w0.5: v1(10.93,4.35) 17.6,11.02 18.86,11.02 20.53,9.35 21.6,9.35 22.11,9.86 22.11,10.91 v1(21.6,11.42)
USB_N: D1.2 J1.2 U6.26 | length 11.3
  Top Layer w0.5: U6.26 36.42,15.02 35.91,14.51 D1.2 35.91,9.43 36.46,8.88 J1.2
USB_P: D1.1 J1.3 U6.27 | length 11.3
  Top Layer w0.5: U6.27 37.22,15 37.81,14.41 D1.1 37.81,9.44 37.26,8.89 J1.3
VIN: R3.2 U2.7 U3.10 | length 26.7
  Top Layer w0.4: U2.7 5.85,38.61
  Top Layer w1: v1(5.845,39.79) 5.85,38.61 ; R3.2 10.44,29.23 10.985,29.775 v1(12.665,29.775) 15.305,29.775 16.2,30.67 17.834,30.67
  Bottom Layer w1: v1(5.845,39.79) 5.845,37.075 6.83,36.09 8.95,36.09 12.665,32.375 v1(12.665,29.775)
VOUT: R8.1 U1.6 | length 10.8
  Top Layer w0.4: 11.75,24.72 12.52,24.72 13.305,25.505 U1.6
  Top Layer w1: R8.1 5,25.63 5.91,24.72 11.75,24.72
VUSB: C17.1 J1.1 R13.1 U4.1 U4.3 VR1.7 VR1.8 | length 93.4
  Top Layer w0.8: U4.3 45.51,28.47 44.99,28.99 44.99,29.82 45.54,30.37 U4.1 46.724,32.794 48.05,34.12 52.71,34.12
  Top Layer w1: 30.91,9.21 33.72,9.21 ; R13.1 33.72,9.21 ; 34.74,6.22 34.74,9.23 33.74,9.23 33.72,9.21
  Top Layer w1.5: v1(29.76,6.43) v1(29.76,7.33) 29.76,8.06 30.91,9.21
  Top Layer w2: C17.1 52.08,37.52 52.71,37.52 52.71,34.12 v1(52.71,31.41) v1@54.01,31.41 ; v1(54.1,30.18) v1@54.1,31.41
  Bottom Layer w1.5: v1(29.76,7.33) v1(29.76,8.28) ; v1@52.48,37.17 VR1.8 v1(52.48,37.92) v1(52.48,38.7)
  Bottom Layer w2: v1(29.76,7.33) v1(29.76,6.43) 29.76,5.29 32.58,2.47 49.58,2.47 54.08,6.97 v1(54.08,31.41) v1(52.71,31.41)
  other v1: 52.45,37.17
XTAL_N: C20.2 U6.36 X1.2 | length 13.7
  Top Layer w0.5: U6.36 45.08,21.05 46.1,20.03
  Top Layer w1: C20.2 X1.2@47.966,12.494 ; 46.1,12.494 46.1,20.03
XTAL_P: C19.2 U6.37 X1.1 | length 12.2
  Top Layer w0.5: U6.37 49.534,21.85 C19.2
  Top Layer w1: X1.1 47.97,21.554 C19.2
pads on no net: J1. J1.4 J2.2 J2.3 J2.8 J2.9 J2.10 P2.2 P2.3 P2.4 U1.1 U1.2 U1.3 U1.7 U4.4 U6.1 U6.2 U6.3 U6.4 U6.5 U6.6 U6.7 U6.13 U6.16 U6.20 U6.21 U6.22 U6.23 U6.24 U6.25 U6.28 U6.29 U6.32 U6.33 U6.40 U6.41 U7.1 U8.1 U8.2 U8.3 U8.5 U8.6 U8.7 U8.8 U8.12 U8.13 U8.14 U8.16 U8.18 U8.19 U8.23 U8.27 U8.28 U8.29 U8.30 U8.31 U8.32 U8.33 U8.36 U8.37 U8.38 U8.39 U8.40 U8.41 U8.42 U8.44

## Polygon pours and split planes (outlines as drawn)
GND on Top Layer "Top_GND" (solid, pour order 5): 1.473,-0.127 ccw(c-0.127,-0.127) -0.127,1.473 -0.127,42.847 ccw(c-0.127,44.447) 1.473,44.447 54.917,44.447 ccw(c56.517,44.447) 56.517,42.847 56.517,1.473 ccw(c56.517,-0.127) 54.917,-0.127
GND on Bottom Layer "Bottom_GND" (solid, pour order 8): 1.473,-0.127 ccw(c-0.127,-0.127) -0.127,1.473 -0.127,42.847 ccw(c-0.127,44.447) 1.473,44.447 54.917,44.447 ccw(c56.517,44.447) 56.517,42.847 56.517,1.473 ccw(c56.517,-0.127) 54.917,-0.127

## Keep-outs
Keep-Out Layer:
  the board outline again, w0.254

## Other copper
Top Layer:
  rectangle net GND: 38.63,5.76 40.13,9.91
  rectangle net VUSB: 34.24,5.71 35.82,8.19
  rectangle net GND: 14.46,5.79 16.41,7.27
  rectangle net GND: 22.35,26.16 24.27,27.34
  rectangle net GND: 20.59,25.94 22.69,27.65
  rectangle net +3.3V_A: 22.43,24.23 24.29,25.44
  rectangle net +3.3V_A: 20.59,24.01 22.7,25.7
  rectangle net NetU3_1: 20.93,32.95 22.74,33.73
  rectangle net NetU3_1: 20.93,30.46 22.74,31.22
  rectangle net SIG: 16.53,32.96 18.33,33.86
  rectangle net +3.3V_A: 4.54,35.39 5.36,37.2

## Silkscreen, mask and mechanical layers (free items; w line width, h text height)
Top Overlay:
  text "MEASURE" at 13.33,37.85 h1.5
  text "USB" at 55.54,9.61 h1.5 r90
  text "PWR" at 31.24,8.55 h1.5
  text "RESET" at 45.45,1.04 h1.5
Bottom Overlay:
  text "Small Impedance Meter" at 44,26.07 h1.5

## Text inside footprints (layer, text, board x,y; h text height)
J2: Top Overlay "JTAG" at 2.98,9.32 h1.5 r90; Bottom Overlay "GND" at 5.113,16.508 h1.5; Bottom Overlay "+5V" at 5.113,13.968 h1.5; Bottom Overlay "NC" at 5.113,11.428 h1.5; Bottom Overlay "TCK" at 5.113,8.761 h1.5; Bottom Overlay "TMS" at 5.113,6.221 h1.5; Bottom Overlay "+3V3" at 15.908,16.508 h1.5; Bottom Overlay "NC" at 12.86,13.968 h1.5; Bottom Overlay "NC" at 12.86,11.428 h1.5; Bottom Overlay "TDI" at 13.749,8.888 h1.5; Bottom Overlay "TDO" at 14.384,6.475 h1.5
P2: Bottom Overlay "CLK" at 29.32,41.8 h1.5; Bottom Overlay "NC" at 30.648,41.313 h1.5 r270; Bottom Overlay "DAT" at 37.55,41.84 h1.5; Bottom Overlay "GND" at 28.108,32.55 h1.5 r270; Bottom Overlay "NC" at 30.648,34.201 h1.5 r270; Bottom Overlay "VCC" at 33.188,32.677 h1.5 r270